# EAGLE board SAMD11 Feather Experiment (EAGLE 9.4.2)
REV: C
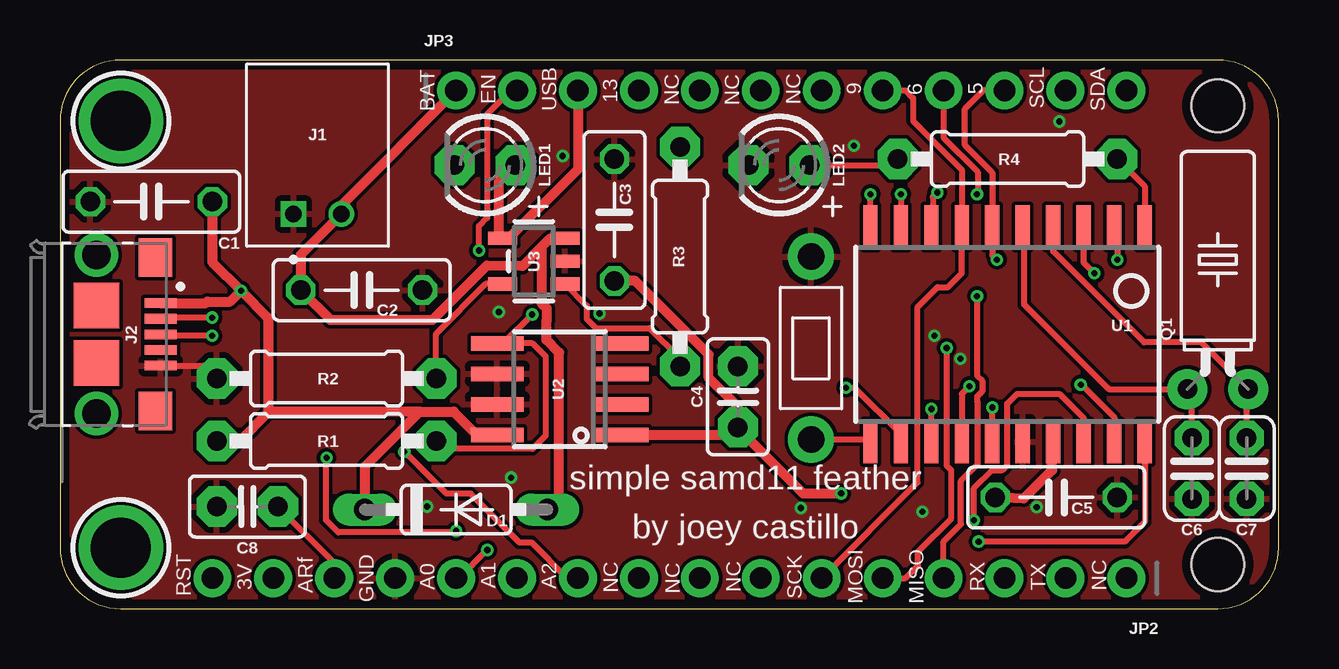
[diagram p0: board, top side]
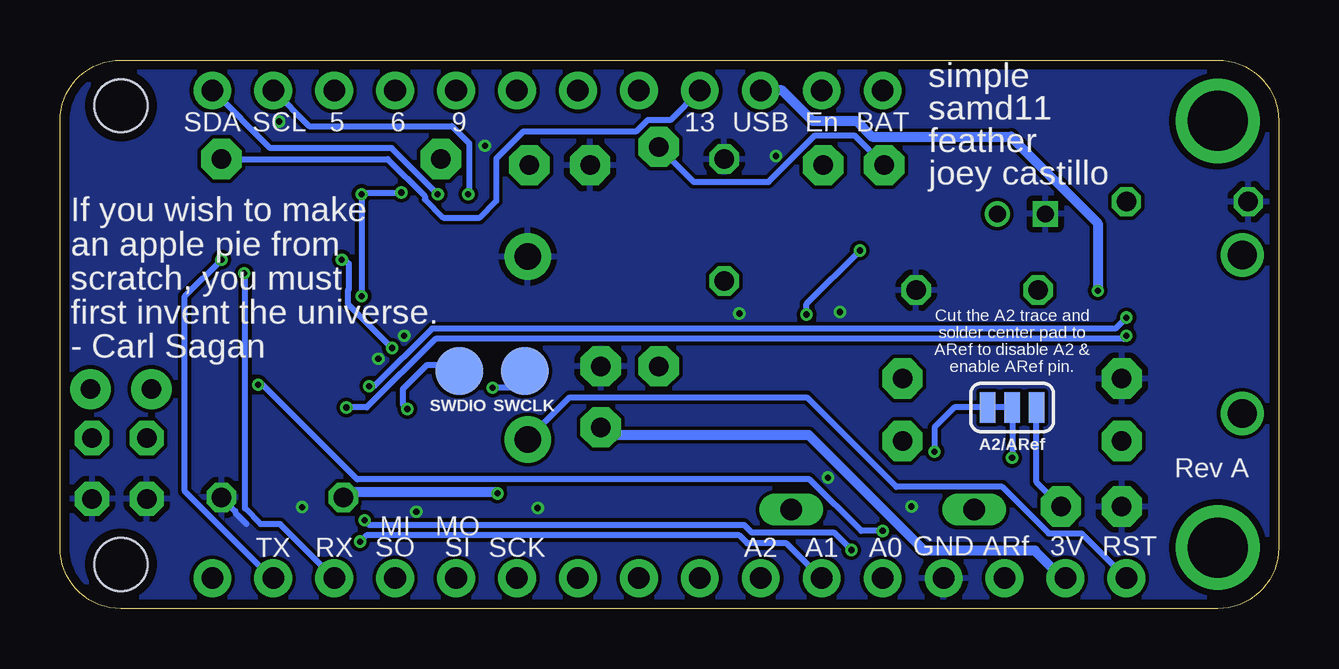
[diagram p1: board, bottom side, seen from below]

Size 50.8 x 22.86 mm. Coordinates in mm from the lower left corner, seen from the top.
Outline: 2.54,0 48.26,0 arc90 50.8,2.54 50.8,20.32 arc90 48.26,22.86 2.54,22.86 arc90 0,20.32 0,2.54 arc90 2.54,0
Copper layers (1*16): Top 0.035559375mm / dielectric 1.6mm / Bottom 0.035559375mm
Design rules "oshpark-2layer *": minimum track width 6mil, minimum drill 10mil, track to track 6mil, track to pad 6mil, pad to pad 6mil, via to via 6mil, smd to smd 6mil, copper to edge 15mil, drill to drill 6mil, minimum pad ring 5mil, minimum via ring 5mil, stop-mask expansion 2.5mil, vias tented up to drill 11mil, thermal gap 10mil
Net classes: 0 default: width 0.254 mm; 1 USB: width 0.254 mm; 2 Power: width 0.406 mm
Holes 2.2 mm at 48.26,1.84 48.26,20.95

## Footprints (pad centres in the part's own frame; a part is rotated, then mirrored left to right if it is on the bottom)
C050-025X075 = drill 0.813 octagon: 1 -2.54,0; 2 2.54,0
C025-025X050 = drill 0.813 pad 1.676 octagon: 1 -1.27,0; 2 1.27,0
C025-024X044 = drill 0.813 pad 1.422 octagon: 1 -1.27,0; 2 1.27,0
DO35-7 = drill 0.889 long: A 3.81,0; C -3.81,0
JST_S2B-PH-K-S(LF)(SN) = drill 0.7 square: 1 1,0 | drill 0.7: 2 -1,0
FCI_10118193-0001LF = smd 0.4 x 1.35: 1 -1.3,2.675; 2 -0.65,2.675; 3 0,2.675; 4 0.65,2.675; 5 1.3,2.675 | smd 1.6 x 1.4: S1 -3.2,2.45; S2 3.2,2.45 | smd 1.9 x 1.9: S3 1.2,0; S4 -1.2,0 | drill 1.2: S5 3.302,0; S6 -3.302,0
SMT-JUMPER_3_1-NC_TRACE_SILK = smd 0.635 x 1.27: 1 -1.016,0; 2 0,0; 3 1.016,0
1X16_ROUND_MIN = drill 0.9 pad 1.575: 1 -19.05,0; 2 -16.51,0; 3 -13.97,0; 4 -11.43,0; 5 -8.89,0; 6 -6.35,0; 7 -3.81,0; 8 -1.27,0; 9 1.27,0; 10 3.81,0; 11 6.35,0; 12 8.89,0; 13 11.43,0; 14 13.97,0; 15 16.51,0; 16 19.05,0
1X12_ROUND_MIN = drill 0.9 pad 1.575: 1 -13.97,0; 2 -11.43,0; 3 -8.89,0; 4 -6.35,0; 5 -3.81,0; 6 -1.27,0; 7 1.27,0; 8 3.81,0; 9 6.35,0; 10 8.89,0; 11 11.43,0; 12 13.97,0
LED3MM = drill 0.813 pad 1.676 octagon: A -1.27,0; K 1.27,0
TC38H = drill 0.813 pad 1.676: 1 -1.27,0; 2 1.27,0
0207/9 = drill 0.813 pad 1.676 octagon: 1 -4.572,0; 2 4.572,0
MJTP1250 = drill 1.1 pad 1.93: P$1 -2.54,0; P$2 5.08,0
TP20R = smd 2 x 2: TP 0,0
SOIC20L = smd 0.6 x 1.8: 1 -5.715,-4.475; 2 -4.445,-4.475; 3 -3.175,-4.475; 4 -1.905,-4.475; 5 -0.635,-4.475; 6 0.635,-4.475; 7 1.905,-4.475; 8 3.175,-4.475; 9 4.445,-4.475; 10 5.715,-4.475; 11 5.715,4.475; 12 4.445,4.475; 13 3.175,4.475; 14 1.905,4.475; 15 0.635,4.475; 16 -0.635,4.475; 17 -1.905,4.475; 18 -3.175,4.475; 19 -4.445,4.475; 20 -5.715,4.475
MICROBUILDER_SOIC8_150MIL = smd 0.6 x 2.2: 1 -1.905,-2.6; 2 -0.635,-2.6; 3 0.635,-2.6; 4 1.905,-2.6; 5 1.905,2.6; 6 0.635,2.6; 7 -0.635,2.6; 8 -1.905,2.6
SOT23-5 = smd 0.55 x 1.2: 1 -0.95,-1.3; 2 0,-1.3; 3 0.95,-1.3; 4 0.95,1.3; 5 -0.95,1.3
MOUNTINGHOLE_2.5_PLATED = drill 2.5 pad 3.2: P$1 0,0

## Placement (x,y rotation side)
C1  10uF  [C050-025X075]  3.81,16.95 180 top
C2  10uF  [C050-025X075]  12.57,13.27 0 top
C3  10uF  [C050-025X075]  23.11,16.19 90 top
C4  1uF  [C025-025X050]  28.26,8.83 90 top
C5  10uF  [C050-025X075]  41.53,4.64 0 top
C6  22pf  [C025-024X044]  47.18,5.84 270 top
C7  22pf  [C025-024X044]  49.47,5.84 270 top
C8  1uF  [C025-025X050]  7.81,4.25 180 top
D1  SCHOTTKY  [DO35-7]  16.51,4.13 0 top
J1  S2B-PH-K-S(LF)(SN)  [JST_S2B-PH-K-S(LF)(SN)]  10.73,16.45 180 top
J2  10118193-0001LF  [FCI_10118193-0001LF]  1.52,11.43 270 top
JP1  A2/VREF  [SMT-JUMPER_3_1-NC_TRACE_SILK]  11.11,8.38 180 bottom
JP2  [1X16_ROUND_MIN]  25.4,1.27 180 top
JP3  [1X12_ROUND_MIN]  30.48,21.59 0 top
LED1  ORANGE  [LED3MM]  17.72,18.48 180 top
LED2  RED  [LED3MM]  29.97,18.48 180 top
Q1  32.768  [TC38H]  48.26,9.14 0 top
R1  100k  [0207/9]  11.11,6.99 180 top
R2  4.7K  [0207/9]  11.11,9.59 0 top
R3  1K  [0207/9]  25.84,14.67 90 top
R4  1K  [0207/9]  39.5,18.73 180 top
SW1  MJTP1250_SPST_SWITCH  [MJTP1250]  31.31,9.59 90 top
SWCLK  TPSQTP20R  [TP20R]  31.43,9.91 180 bottom
SWDIO  TPSQTP20R  [TP20R]  34.16,9.91 180 bottom
U1  ATSAMD11D14A  [SOIC20L]  39.5,11.43 180 top
U2  [MICROBUILDER_SOIC8_150MIL]  20.83,9.14 90 top
U3  MCP73831T-2ACI/OT  [SOT23-5]  19.75,14.48 90 top
U$31  MOUNTINGHOLE2.5  [MOUNTINGHOLE_2.5_PLATED]  2.54,20.32 270 top
U$32  MOUNTINGHOLE2.5  [MOUNTINGHOLE_2.5_PLATED]  2.54,2.54 270 top

## Library data of the parts
C1-C8 D1 LED1 LED2 R1-R4 = adafruit
J1 = S2B-PH-K-S_LF__SN_; DESCRIPTION: PH Series 2 Position 2.0 mm Through Hole Side Entry Shrouded Header; DIGI-KEY_PART_NUMBER: 455-1719-ND; DIGI-KEY_PURCHASE_URL: https://www.digikey.com/product-detail/en/jst-sales-america-inc/S2B-PH-K-S_LF__SN_/455-1719-ND/926626?utm_source=snapeda&utm_medium=aggregator&utm_campaign=symbol; MF: JST Sales; MP: S2B-PH-K-S_LF__SN_; PACKAGE: None
J2 = 10118193-0001LF; DESCRIPTION: Single Port 5 Contact Shielded SMT MICRO USB B-Type Receptacle; DIGI-KEY_PART_NUMBER: 609-4616-1-ND; DIGI-KEY_PURCHASE_URL: https://www.digikey.com/product-detail/en/amphenol-icc-fci/10118193-0001LF/609-4616-1-ND/2785380?utm_source=snapeda&utm_medium=aggregator&utm_campaign=symbol; MF: Amphenol ICC; MP: 10118193-0001LF; PACKAGE: None
JP1 = SparkFun-Jumpers
JP2 JP3 U3 = microbuilder
Q1 = adafruit; OC_FARNELL: unknown; OC_NEWARK: unknown
SW1 U1 = My Stuff
SWCLK SWDIO = testpad
U2 = Adafruit Feather M0 Express
U$31 U$32 = microbuilder; BOM: EXCLUDE

## Nets
!RESET: JP2.16 SW1.P$1 U1.11
+3V3 [Power]: C3.1 C4.1 C5.1 JP2.15 U1.17 U2.1
A0: JP2.12 U1.18
A1: JP2.11 U1.20
A2: JP1.3 JP2.10
A2/VREF: JP1.2 U1.19
EN: JP3.2 R1.1 U2.5
GND: C1.2 C2.2 C3.2 C4.2 C5.2 C6.2 C7.2 C8.2 J1.1 J2.5 JP2.13 LED2.K R2.1 SW1.P$2 U1.16 U2.6 U2.7 U3.2
LED/13: JP3.4 R4.1 U1.1
MISO/6: JP2.4 JP3.9 U1.8
MOSI/5: JP2.5 JP3.10 U1.6
N$1: LED1.K R3.2
N$2: LED2.A R4.2
PROG: R2.2 U3.5
RX: JP2.3 U1.3
SCK/9: JP2.6 JP3.8 U1.7
SCL: JP3.11 U1.10
SDA: JP3.12 U1.9
STAT: R3.1 U3.1
SWCLK: SWCLK.TP U1.12
SWDIO: SWDIO.TP U1.13
TX: JP2.2 U1.2
USB/DM [USB]: J2.2 U1.14
USB/DP [USB]: J2.3 U1.15
VBAT [Power]: C2.1 D1.A J1.2 JP3.1 U3.3
VBUS [Power]: C1.1 D1.C J2.1 JP3.3 LED1.A R1.2 U2.8 U3.4
VREF: C8.1 JP1.1 JP2.14
XIN: C7.1 Q1.2 U1.4
XOUT: C6.1 Q1.1 U1.5

## Tracks (layer width: path | path; a pad name or v marks a point on that pad's centre or on a via)
!RESET
  Top 0.254: SW1.P$1 33.69,7.05 U1.11
  Bottom 0.254: JP2.16 8.22,3.14 9.59,3.14 11.53,5.07 15.94,5.07 19.67,8.8 29.55,8.8 SW1.P$1
+3V3  (via drill 0.25)
  Top 0.406: U1.17 41.35,6.91 41.35,5.77 40.17,4.58 C5.1 | v32.56,4.8 30.98,4.8 28.26,7.52 C4.1 | U2.1 27.94,7.24 C4.1 | C4.1 28.26,8.41 27.04,9.63 27.04,10.59 23.98,13.65 C3.1
  Bottom 0.406: C4.1 27.94,7.24 19.59,7.24 14.77,2.41 10.16,2.41 9.02,1.27 JP2.15 | C5.1 38.76,4.86 32.63,4.86 v32.56,4.8
A0  (via drill 0.25)
  Top 0.254: v38.1,3.68 38.1,5.02 38.86,5.78 39.28,5.78 39.49,5.99 39.49,8.54 39.9,8.95 41.66,8.95 42.67,7.94 U1.18 | v17.81,2.44 16.64,1.27 JP2.12
  Bottom 0.254: v38.1,3.68 37.91,3.49 22.29,3.49 21.97,3.17 18.54,3.17 v17.81,2.44
A1  (via drill 0.25)
  Top 0.254: U1.20 45.21,3.62 44.39,2.79 v38.29,2.79
  Bottom 0.254: v38.29,2.79 38.04,3.05 22.48,3.05 22.15,2.72 20.51,2.72 19.07,1.27 JP2.11
A2  (via drill 0.25)
  Top 0.254: v14.35,6.54 v14.36,6.54 16.11,4.79 17.12,4.79 19.14,2.76 19.65,2.76 21.14,1.27 JP2.10
  Bottom 0.254: JP1.3 13.53,8.38 14.35,7.56 v14.35,6.54
A2/VREF  (via drill 0.25)
  Top 0.254: U1.19 43.94,7.98 42.59,9.34 v42.55,9.34 | v11.11,6.29 11.07,6.25 11.07,3.7 11.6,3.17 16.45,3.17 v16.51,3.24
  Bottom 0.254: JP1.2 v11.11,6.29 | v42.55,9.34 42.35,9.34 38.41,5.39 19.55,5.39 17.4,3.24 v16.51,3.24
EN  (via drill 0.25)
  Top 0.254: JP3.2 18.8,21.59 17.8,20.6 17.8,16.28 17.46,15.94 v17.46,14.92 | v19.68,12.26 18.48,11.05 U2.5 19.7,11.06 20.24,10.51 20.24,7.2 19.7,6.66 16.01,6.66 R1.1
  Bottom 0.254: v19.68,12.26 19.68,12.7 v17.46,14.92
GND  (via drill 0.25)
  Top 0.254: J2.5 6,10.13 R2.1
  Bottom 0.254: C5.2 43.5,4.06 43.5,4 43.02,3.53
  other vias: 37.53,10.41 20.95,18.86 15.3,4.25 22.48,12.3 35.95,4.04 33.09,19.28 41.66,20.3 40.71,4.23 30.89,4.19 18.29,12.36 36.45,11.37 18.8,5.46
  pour Top: 0,22.86 0,0 50.93,0 50.93,22.86
  pour Bottom: 0,0 51.18,0 51.18,22.86 0,22.86
LED/13
  Top 0.254: R4.1 45.21,17.59 U1.1
  Bottom 0.254: R4.1 37.14,18.73 35.59,17.18 35.59,17.05 34.83,16.29 33.31,16.29 32.61,16.99 32.61,18.75 31.49,19.88 26.79,19.88 26.31,20.36 25.36,20.36 JP3.4
MISO/6  (via drill 0.25)
  Top 0.254: JP2.4 36.83,2.79 37.56,3.52 37.56,5.33 38.23,6 38.23,8.64 38.23,8.83 38.44,9.05 38.44,9.49 38.23,9.71 v38.23,13.02 | JP3.9 36.83,19.62 38.25,18.2 38.25,17.3 v38.23,17.27 | v36.57,17.34 36.38,17.15 36.38,15.96 U1.8
  Bottom 0.254: v36.57,17.34 v36.58,17.34 38.16,17.34 v38.23,17.27 v38.23,13.02
MOSI/5  (via drill 0.25)
  Top 0.254: v36.96,10.86 36.96,5.97 37.15,5.77 37.15,3.75 35.76,2.36 35.76,1.79 35.24,1.27 JP2.5 | JP3.10 38.48,21.59 37.72,20.83 37.72,19.31 38.86,18.17 U1.6 38.86,14.73 v39.05,14.54
  Bottom 0.254: v39.05,14.54 38.92,14.54 38.76,14.38 38.76,13.31 38.81,13.26 38.81,12.71 v36.96,10.86
N$1
  Bottom 0.254: LED1.K 17.69,19.72 19.32,19.72 21.27,17.78 24.38,17.78 R3.2
N$2
  Top 0.254: LED2.A 34.67,18.48 R4.2
PROG
  Top 0.254: U3.5 17.75,13.53 15.68,11.46 R2.2
RX  (via drill 0.25)
  Top 0.254: v43.12,13.97 42.67,14.41 U1.3
  Bottom 0.254: JP2.3 41.62,3.52 42.44,3.52 43.09,4.17 43.09,13.95 v43.12,13.97
SCK/9
  Top 0.254: JP2.6 35.74,5.26 35.74,12.56 36.58,13.4 37.02,13.4 37.59,13.97 U1.7 37.59,18.29 35.56,20.32 35.56,21.27 35.24,21.59 JP3.8
SCL  (via drill 0.25)
  Top 0.254: U1.10 v33.78,17.27
  Bottom 0.254: v33.78,17.27 33.74,17.31 33.74,19.39 34.46,20.1 40.42,20.1 JP3.11
SDA  (via drill 0.25)
  Top 0.254: v35.05,17.27 U1.9
  Bottom 0.254: v35.05,17.27 36.97,19.19 42.03,19.19 44.44,21.59 JP3.12
STAT
  Top 0.254: U3.1 21.95,12.63 21.95,12.08 22.34,11.69 24.58,11.69 25.84,10.43 R3.1
SWCLK  (via drill 0.25)
  Top 0.254: v32.77,9.21 33.12,9.21 35.05,7.28 U1.12
  Bottom 0.254: v32.77,9.21 31.94,9.21 31.43,9.72 SWCLK.TP
SWDIO  (via drill 0.25)
  Top 0.254: U1.13 v36.32,8.32
  Bottom 0.254: SWDIO.TP 34.42,10.16 35.5,10.16 36.51,9.14 36.51,8.51 v36.32,8.32
TX  (via drill 0.25)
  Top 0.254: U1.2 44.07,15.78 v44.07,14.54
  Bottom 0.254: v44.07,14.54 45.59,13.02 45.59,4.89 41.97,1.27 JP2.2
USB/DM  (via drill 0.25)
  Top 0.254: v37.91,9.27 37.59,8.95 U1.14 | J2.2 4.25,12.13 v6.35,12.13
  Bottom 0.254: v6.35,12.13 6.81,11.67 35.3,11.67 37.7,9.27 v37.91,9.27
USB/DP  (via drill 0.25)
  Top 0.254: U1.15 v38.86,8.38 | J2.3 4.26,11.37 v6.35,11.37
  Bottom 0.254: v6.35,11.37 6.48,11.24 35.15,11.24 38.01,8.38 v38.86,8.38
VBAT
  Top 0.406: JP3.1 11.73,16.81 J1.2 10.03,14.75 C2.1 11.27,12.03 15.53,12.03 17.78,14.29 19.27,14.27 20.06,15.06 | U3.3 20.43,15.43 20.06,15.06 | D1.A 20.8,4.61 20.8,10.67 20.27,11.2 20.27,11.98 20.3,12 20.3,12.51 20.09,12.71 20.09,15.02 20.06,15.06
VBUS  (via drill 0.25)
  Top 0.406: D1.C 12.7,5.91 15,8.2 | v7.54,13.25 7.09,12.79 6.15,12.79 6.09,12.73 J2.1 | C1.1 6.35,14.44 v7.54,13.25 | v7.54,13.25 8.69,12.1 8.69,8.2 | JP3.3 21.59,18.32 18.7,15.43 U3.4 18.29,15.59 18.29,17.78 LED1.A | U2.8 17.37,7.24 16.41,8.2 15,8.2 | 15,8.2 8.69,8.2 | 7.47,6.99 R1.2 7.49,6.99 8.69,8.18 8.69,8.2
  Bottom 0.406: v7.54,13.25 7.54,16.05 11.16,19.67 16.96,19.67 17.61,20.32 19.43,20.32 20.7,21.59 JP3.3
VREF
  Top 0.254: C8.1 11.43,1.91 JP2.14
  Bottom 0.254: C8.1 10.1,5.27 JP1.1
XIN
  Top 0.254: U1.4 41.4,14.89 45.2,11.1 47.58,11.1 Q1.2 49.47,9.08 C7.1
XOUT
  Top 0.254: U1.5 40.2,15.84 40.2,12.67 43.72,9.14 Q1.1 47.18,8.95 C6.1

## Text on the board
tPlace: BAT | EN | USB | 13 | NC | NC | NC | 9 | 6 | 5 | SCL | SDA | simple samd11 feather / by joey castillo | RST | 3V | ARf | GND | A0 | A1 | A2 | NC | NC | NC | SCK | MOSI | MISO | RX | TX | NC
bPlace: simple / samd11 / feather / joey castillo | BAT | En | USB | 13 | 9 | 6 | 5 | SCL | SDA | If you wish to make / an apple pie from / scratch, you must / first invent the universe. / - Carl Sagan | Cut the A2 trace and / solder center pad to / ARef to disable A2 & / enable ARef pin. | A2/ARef | Rev A | RST | 3V | ARf | GND | A0 | A1 | A2 | SCK | MO / SI | MI / SO | RX | TX